# EAGLE board Brain3port (EAGLE 9.3.2)
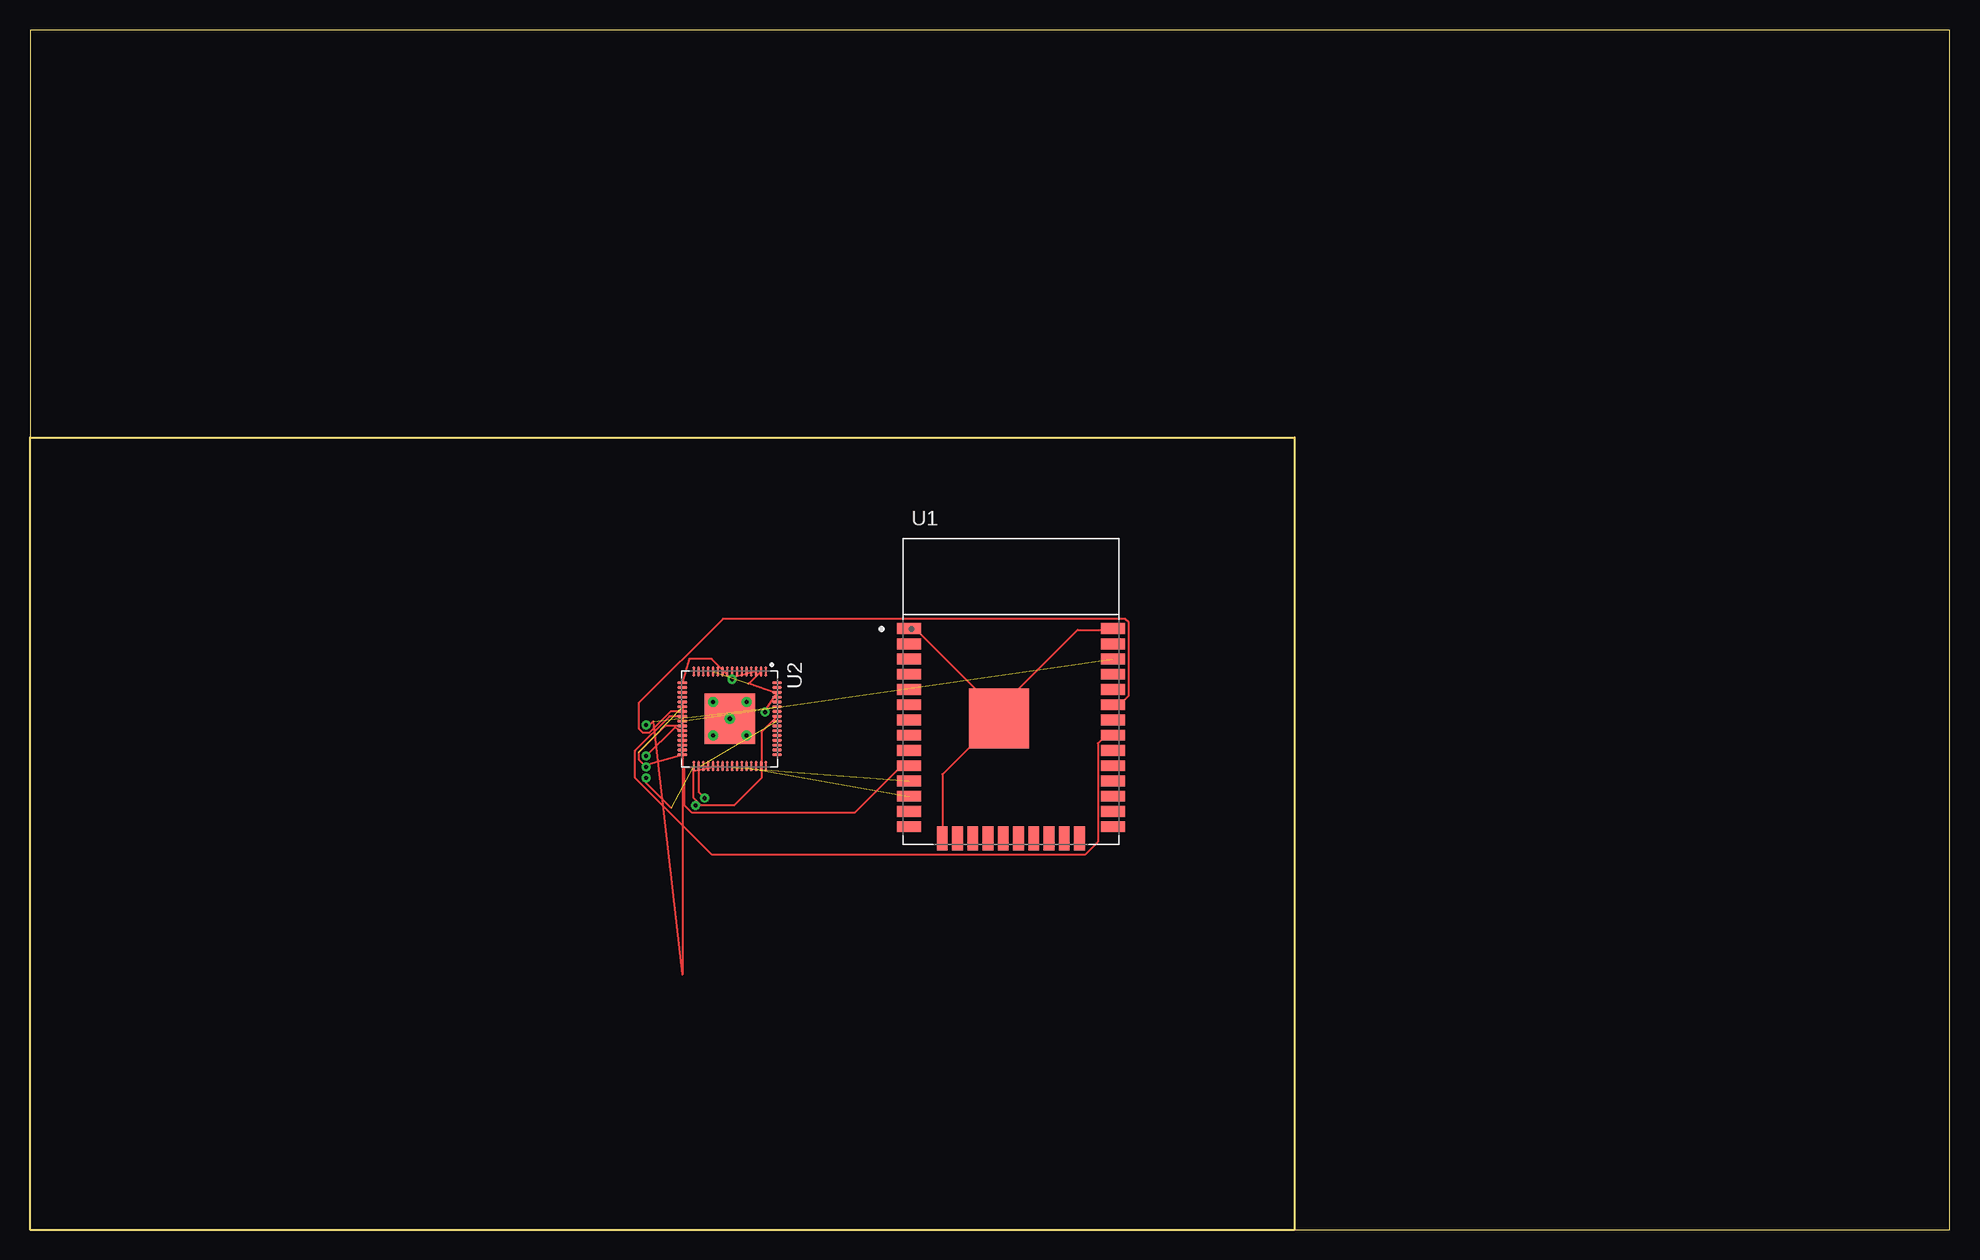
[diagram p0: board, top side]
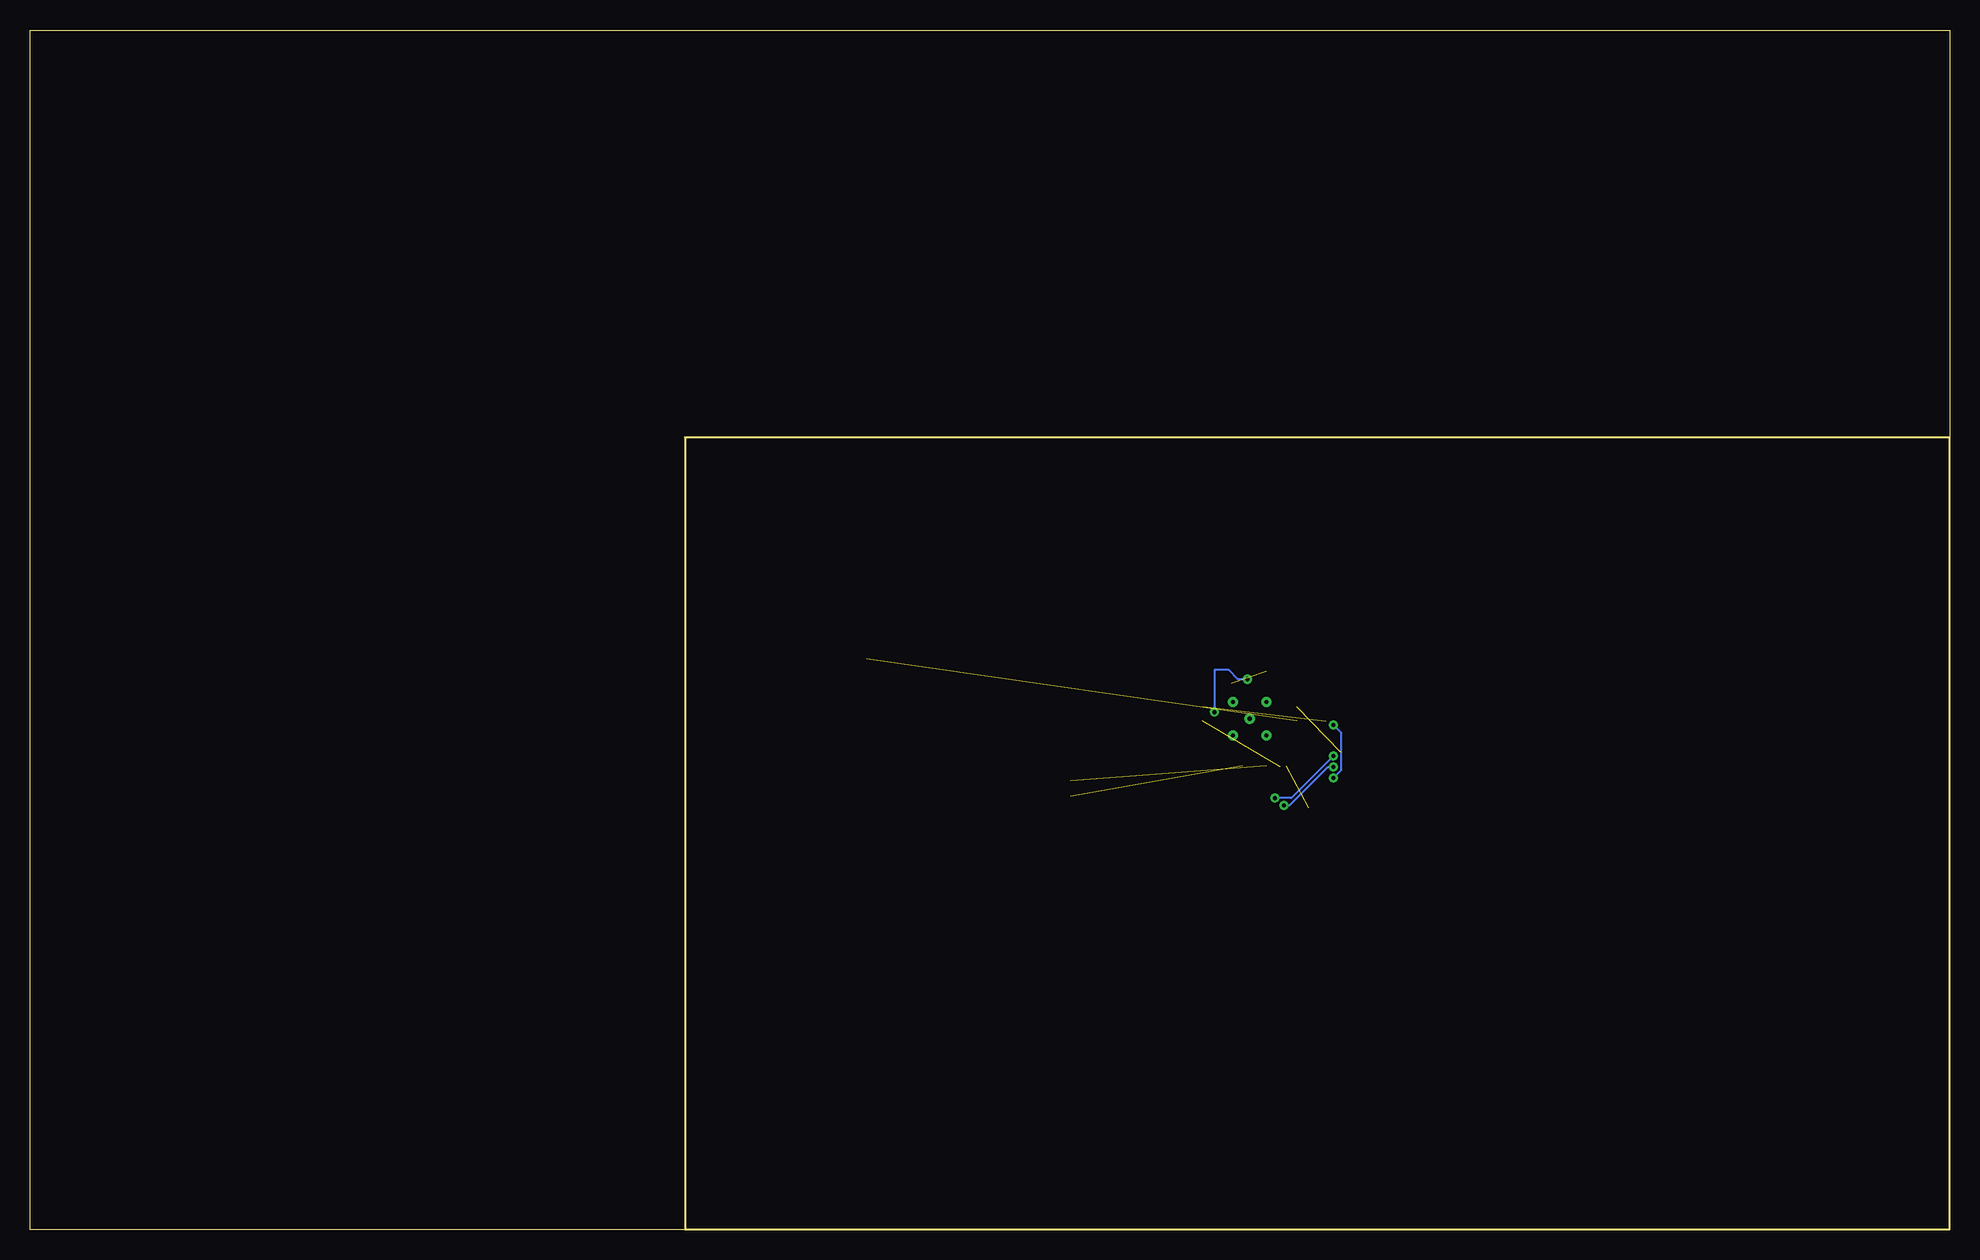
[diagram p1: board, bottom side, seen from below]

Size 160 x 100 mm. Coordinates in mm from the lower left corner, seen from the top.
Outline: 105.41,0 160,0 160,100 0,100 0,66.04
Outline: 0,66.04 0,0 105.41,0
Outline: 0,66.04 105.41,66.04 105.41,0
Copper layers (1+2*15+16): Top 0.035mm / dielectric 1.5mm / Route2 0.035mm / dielectric 0.15mm / Route15 0.035mm / dielectric 0.2mm / Bottom 0.035mm
Design rules "default *": minimum track width 6mil, minimum drill 0.35mm, track to track 6mil, track to pad 6mil, pad to pad 6mil, via to via 6mil, smd to smd 6mil, copper to edge 40mil, drill to drill 6mil, minimum pad ring 10mil, minimum via ring 8mil, stop-mask expansion 4mil, vias tented up to drill 0mil, thermal gap 10mil

## Footprints (pad centres in the part's own frame; a part is rotated, then mirrored left to right if it is on the bottom)
MODULE_ESP32-WROOM-32D = smd 2 x 0.9: 1 -8.5,5.26; 2 -8.5,3.99; 3 -8.5,2.72; 4 -8.5,1.45; 5 -8.5,0.18; 6 -8.5,-1.09; 7 -8.5,-2.36; 8 -8.5,-3.63; 9 -8.5,-4.9; 10 -8.5,-6.17; 11 -8.5,-7.44; 12 -8.5,-8.71; 13 -8.5,-9.98; 14 -8.5,-11.25; 25 8.5,-11.25; 26 8.5,-9.98; 27 8.5,-8.71; 28 8.5,-7.44; 29 8.5,-6.17; 30 8.5,-4.9; 31 8.5,-3.63; 32 8.5,-2.36; 33 8.5,-1.09; 34 8.5,0.18; 35 8.5,1.45; 36 8.5,2.72; 37 8.5,3.99; 38 8.5,5.26 | smd 0.9 x 2: 15 -5.715,-12.25; 16 -4.445,-12.25; 17 -3.175,-12.25; 18 -1.905,-12.25; 19 -0.635,-12.25; 20 0.635,-12.25; 21 1.905,-12.25; 22 3.175,-12.25; 23 4.445,-12.25; 24 5.715,-12.25 | smd 5 x 5: 39 -1,-2.24
QFN40P800X800X90-65N = smd 0.81 x 0.22: 1 -3.945,3; 2 -3.945,2.6; 3 -3.945,2.2; 4 -3.945,1.8; 5 -3.945,1.4; 6 -3.945,1; 7 -3.945,0.6; 8 -3.945,0.2; 9 -3.945,-0.2; 10 -3.945,-0.6; 11 -3.945,-1; 12 -3.945,-1.4; 13 -3.945,-1.8; 14 -3.945,-2.2; 15 -3.945,-2.6; 16 -3.945,-3; 33 3.945,-3; 34 3.945,-2.6; 35 3.945,-2.2; 36 3.945,-1.8; 37 3.945,-1.4; 38 3.945,-1; 39 3.945,-0.6; 40 3.945,-0.2; 41 3.945,0.2; 42 3.945,0.6; 43 3.945,1; 44 3.945,1.4; 45 3.945,1.8; 46 3.945,2.2; 47 3.945,2.6; 48 3.945,3 | smd 0.22 x 0.81: 17 -3,-3.945; 18 -2.6,-3.945; 19 -2.2,-3.945; 20 -1.8,-3.945; 21 -1.4,-3.945; 22 -1,-3.945; 23 -0.6,-3.945; 24 -0.2,-3.945; 25 0.2,-3.945; 26 0.6,-3.945; 27 1,-3.945; 28 1.4,-3.945; 29 1.8,-3.945; 30 2.2,-3.945; 31 2.6,-3.945; 32 3,-3.945; 49 3,3.945; 50 2.6,3.945; 51 2.2,3.945; 52 1.8,3.945; 53 1.4,3.945; 54 1,3.945; 55 0.6,3.945; 56 0.2,3.945; 57 -0.2,3.945; 58 -0.6,3.945; 59 -1,3.945; 60 -1.4,3.945; 61 -1.8,3.945; 62 -2.2,3.945; 63 -2.6,3.945; 64 -3,3.945 | smd 4.2 x 4.2: 65 0,0 | drill 0.35 pad 0.45: P$2 0,0; P$3 -1.4,1.4; P$4 1.4,1.4; P$5 1.4,-1.4; P$6 -1.4,-1.4

## Placement (x,y rotation side)
U1  ESP32-WROOM-32D  [MODULE_ESP32-WROOM-32D]  81.75,44.84 0 top
U2  KSZ8794CNXCC  [QFN40P800X800X90-65N]  58.33,42.58 270 top

## Library data of the parts
U1 = ESP32-WROOM-32D; DESCRIPTION: IC: SoC; GPIO, I2C, I2S, IR, SD, SDIO, SPI, UART; 2.7÷3.6VDC; 20dBm; DIGI-KEY_PART_NUMBER: 1904-1023-1-ND; DIGI-KEY_PURCHASE_URL: https://www.digikey.com/product-detail/en/espressif-systems/ESP32-WROOM-32D/1904-1023-1-ND/9381732?utm_source=snapeda&utm_medium=aggregator&utm_campaign=symbol; MF: Espressif Systems; MP: ESP32-WROOM-32D; PACKAGE: Module Espressif Systems
U2 = KSZ8794CNXCC; DESCRIPTION: 4-Port 10/100 Switch with RGMII/GMII, 64 VQFN 8x8x0.9mm T/R; DIGI-KEY_PART_NUMBER: KSZ8794CNXCC-CT-ND; DIGI-KEY_PURCHASE_URL: https://www.digikey.com/product-detail/en/microchip-technology/KSZ8794CNXCC-TR/KSZ8794CNXCC-CT-ND/9923662?utm_source=snapeda&utm_medium=aggregator&utm_campaign=symbol; MF: Microchip; MP: KSZ8794CNXCC-TR; PACKAGE: QFN-64 Microchip

## Nets
3V3: U1.2
CLK_IN: U1.25
CRS_DV: U1.12 U2.42
GND: U1.1 U1.15 U1.38 U1.39
GNDA: U2.3 U2.17 U2.62
GNDD: U2.22 U2.26 U2.32 U2.38 U2.57
MDC: U1.21
MDIO: U1.22
RXD0: U1.10 U2.36
RXD1: U1.11 U2.37
TX_EN: U1.33 U2.23
TXD0: U1.31 U2.24
TXD1: U1.36 U2.25
VDD12A: U2.1
VDD12D: U2.21 U2.33 U2.59
VDDAT33: U2.2 U2.12 U2.60
VDDIO: U2.27 U2.39 U2.56

## Tracks (layer width: path | path; a pad name or v marks a point on that pad's centre or on a via)
CRS_DV  (1 unrouted)
GND
  Top 0.152: 80.64,42.45 U1.39 | 80.62,43.28 73.91,49.99 73.3,49.99 U1.1 | 80.62,43.28 80.62,42.67 U1.39 | U1.15 76.05,32.61 76.05,37.95 80.62,42.52 U1.39 | 80.62,43.28 87.33,49.99 90.22,49.99 U1.38 | 80.62,43.28 U1.39
GNDA  (via drill 0.35)
  Top 0.152: U2.17 54.97,47.57 56.83,47.57 v58.52,45.87 58.71,46.06 U2.3 | U2.62 61.2,43.19 v61.27,43.13
  Bottom 0.152: v58.52,45.87 59.32,45.87 60.12,46.67 61.27,46.67 v61.27,43.13
GNDD  (via drill 0.35)  (1 unrouted)
  Top 0.152: U2.32 51.56,38.76 v51.36,38.56 50.75,39.17 50.75,39.78 52.95,41.98 U2.26 | 55.47,35.81 55.93,35.36 58.67,35.36 60.96,37.64 60.96,41.47 U2.57 | 55.47,35.81 55.32,35.97 55.32,38.22 U2.38 | 55.47,35.81 v55.47,35.36
  Bottom 0.152: v51.36,38.56 51.82,38.56 55.02,35.36 v55.47,35.36
RXD0
  Top 0.152: U2.36 54.56,38.51 54.56,35.36 55.17,34.75 68.73,34.75 72.54,38.56 73.15,38.56 U1.10
RXD1  (1 unrouted)
TX_EN
  Top 0.152: 90.27,43.73 U1.33 90.37,43.89 90.98,43.89 91.59,44.5 91.59,50.6 91.29,50.9 57.76,50.9 50.75,43.89 50.75,41.76 51.05,41.45 51.66,41.45 53.39,43.18 U2.23
TXD0
  Top 0.152: U2.24 53.3,42.78 50.44,39.93 50.44,37.64 56.84,31.24 87.94,31.24 89,32.31 89,40.54 89.61,41.15 90.22,41.15 U1.31
TXD1  (1 unrouted)
VDD12D  (via drill 0.35)  (2 unrouted)
  Top 0.152: 53.45,35.15 51.36,37.24 v51.36,37.64 | v51.36,42.06 51.66,42.06 51.97,42.37 54.38,21.26 U2.21
  Bottom 0.152: v51.36,37.64 50.75,38.25 50.75,41.45 v51.36,42.06
VDDAT33  (1 unrouted)
  Top 0.152: U2.60 62.27,44.68 59.88,45.52 59.93,45.52 U2.2
VDDIO  (via drill 0.35)  (1 unrouted)
  Top 0.152: v56.24,35.97 55.78,36.42 55.78,38.56 U2.39 | v51.36,39.47 53.76,41.87 U2.27
  Bottom 0.152: v56.24,35.97 54.86,35.97 v51.36,39.47